# Altium PCB PCB_WSTICKSR.pcbdoc
Units mm, origin at the board's own origin, x right, y up, seen from the top; angles counter-clockwise.
Board outline 77.3 x 48.71 mm, 2 copper layers (Top Layer, Bottom Layer); 59 components, 34 nets, 182 pads, 73 vias.
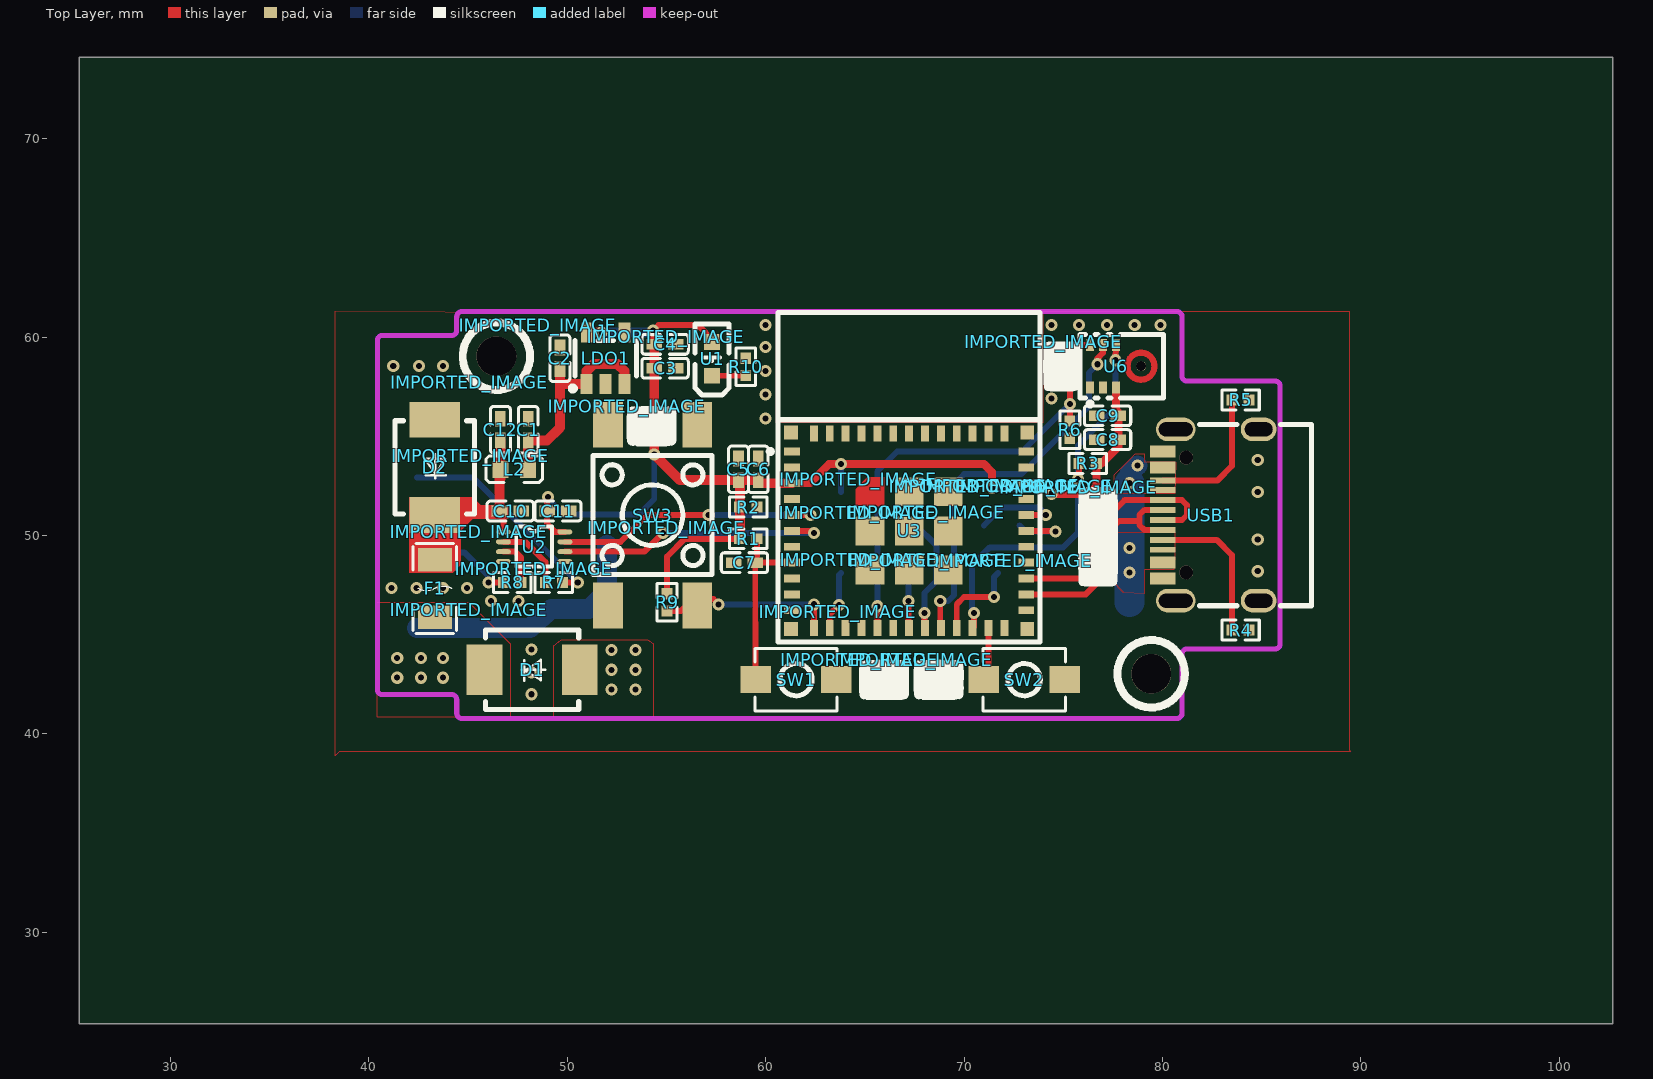
[diagram p0: Top Layer view]
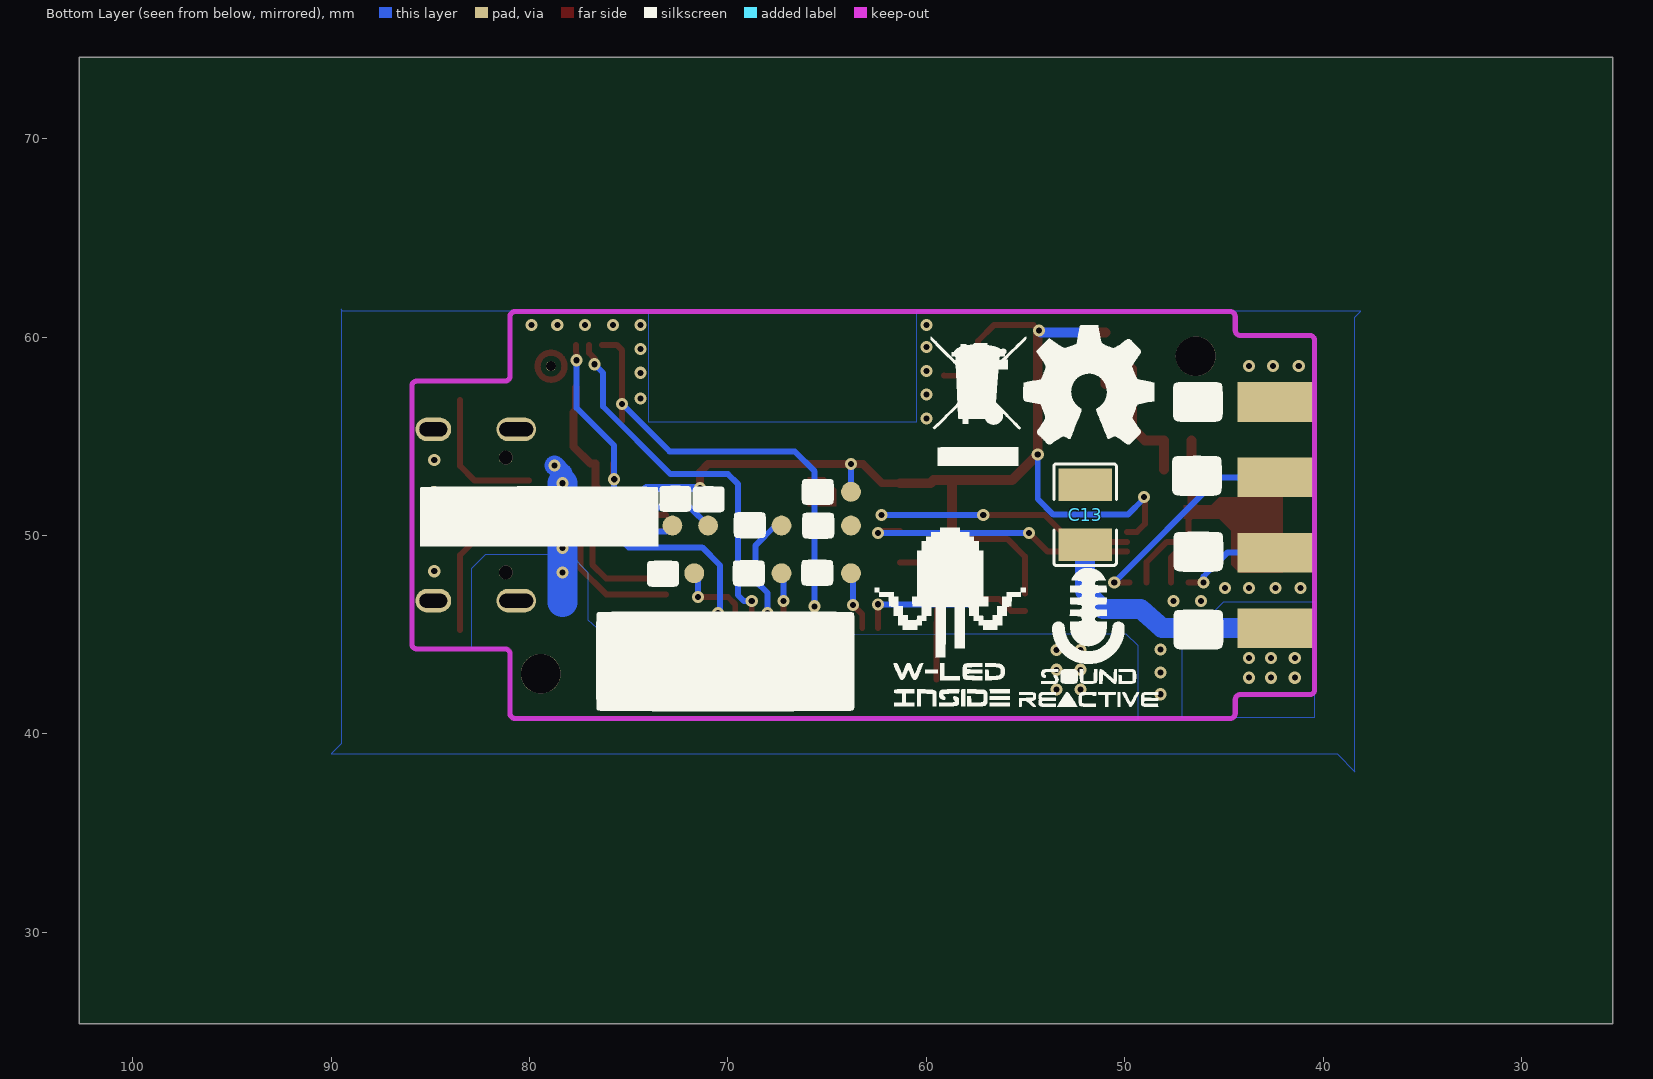
[diagram p1: Bottom Layer view, seen from below]

## Layer stack, top to bottom
Top Layer: signal copper (thickness not stored)
Dielectric: dielectric 0.32, FR-4, Dk 4.8
Bottom Layer: signal copper (thickness not stored)

## Board outline
102.7,25.4 25.4,25.4 25.4,74.11 102.7,74.11

## Components (designator, comment, footprint, x,y, rotation, side; value= is the part's Value field where it differs from the comment)
C1 "100nF" C0402 48.032,55.332 r270 top
C2 "10uF" C0402 49.632,58.932 r270 top
C3 "10uF" C0402 54.932,58.432 r180 top
C4 "100nF" C0402 54.932,59.632 r180 top
C5 "100nF" C0402 58.632,53.332 r270 top
C6 "10uF" C0402 59.632,53.332 r270 top
C7 "1uF" C0402 58.932,48.632 r180 top
C8 "220pF" C0402 77.232,54.832 r180 top
C9 "100nF" C0402 77.232,56.032 r180 top
C10 "100nF" C0402 47.132,51.232 r180 top
C11 "100nF" C0402 49.532,51.232 r180 top
C12 "100nF" C0402 46.632,55.332 r270 top
C13 "100uF" C1210 52,51.05 r90 bottom
D1 "SS34" SMB_L4.6-W3.6-LS5.3-R-RD 48.232,43.232 r0 top
D2 "SS34" SMB_L4.6-W3.6-LS5.3-R-RD 43.332,53.432 r90 top
F1 "1206L050/15YR" F1206 43.332,47.332 r90 top
IMPORTED_IMAGE "IMPORTED_IMAGE" IMPORTED_IMAGE 48.321,48.327 r0 top
IMPORTED_IMAGE "IMPORTED_IMAGE" IMPORTED_IMAGE 63.629,46.154 r0 top
IMPORTED_IMAGE "IMPORTED_IMAGE" IMPORTED_IMAGE 73.517,52.47 r0 top
IMPORTED_IMAGE "IMPORTED_IMAGE" IMPORTED_IMAGE 64.676,52.845 r0 top
IMPORTED_IMAGE "IMPORTED_IMAGE" IMPORTED_IMAGE 64.651,51.145 r0 top
IMPORTED_IMAGE "IMPORTED_IMAGE" IMPORTED_IMAGE 72.476,48.72 r0 top
IMPORTED_IMAGE "IMPORTED_IMAGE" IMPORTED_IMAGE 68.151,48.745 r0 top
IMPORTED_IMAGE "IMPORTED_IMAGE" IMPORTED_IMAGE 64.701,48.77 r0 top
IMPORTED_IMAGE "IMPORTED_IMAGE" IMPORTED_IMAGE 68.101,51.17 r0 top
IMPORTED_IMAGE "IMPORTED_IMAGE" IMPORTED_IMAGE 70.176,52.47 r0 top
IMPORTED_IMAGE "IMPORTED_IMAGE" IMPORTED_IMAGE 71.851,52.495 r0 top
IMPORTED_IMAGE "IMPORTED_IMAGE" IMPORTED_IMAGE 45.045,46.257 r0 top
IMPORTED_IMAGE "IMPORTED_IMAGE" IMPORTED_IMAGE 45.07,57.732 r0 top
IMPORTED_IMAGE "IMPORTED_IMAGE" IMPORTED_IMAGE 45.045,50.182 r0 top
IMPORTED_IMAGE "IMPORTED_IMAGE" IMPORTED_IMAGE 45.12,54.007 r0 top
IMPORTED_IMAGE "IMPORTED_IMAGE" IMPORTED_IMAGE 48.509,60.59 r0 top
IMPORTED_IMAGE "IMPORTED_IMAGE" IMPORTED_IMAGE 54.976,60.009 r0 top
IMPORTED_IMAGE "IMPORTED_IMAGE" IMPORTED_IMAGE 55,50.4 r0 top
IMPORTED_IMAGE "IMPORTED_IMAGE" IMPORTED_IMAGE 64.725,43.729 r0 top
IMPORTED_IMAGE "IMPORTED_IMAGE" IMPORTED_IMAGE 67.475,43.729 r0 top
IMPORTED_IMAGE "IMPORTED_IMAGE" IMPORTED_IMAGE 53.006,56.507 r0 top
IMPORTED_IMAGE "IMPORTED_IMAGE" IMPORTED_IMAGE 74.001,59.772 r0 top
IMPORTED_IMAGE "IMPORTED_IMAGE" IMPORTED_IMAGE 75.755,52.43 r0 top
L2 "120Ω" L0603 47.332,53.332 r0 top
LDO1 "ME6211C33M5G-N" SOT-23-5_L3.0-W1.7-P0.95-LS2.8-BR 51.932,58.932 r270 top
R1 "10kΩ" R0402 59.132,49.832 r0 top
R2 "10kΩ" R0402 59.132,51.432 r180 top
R3 "10kΩ" R0402 76.232,53.632 r0 top
R4 "5.1kΩ" R0402 83.932,45.232 r0 top
R5 "5.1kΩ" R0402 83.932,56.832 r0 top
R6 "100K" R0402 75.332,55.332 r90 top
R7 "470Ω" R0402 49.332,47.632 r180 top
R8 "470Ω" R0402 47.232,47.632 r0 top
R9 "10kΩ" R0402 55.032,46.632 r270 top
R10 "1.5kΩ" R0402 59,58.5 r90 top
SW1 "TS-1088-AR02016" SW-SMD_L4.0-W2.9-LS5.0 61.532,42.732 r180 top
SW2 "TS-1088-AR02016" SW-SMD_L4.0-W2.9-LS5.0 73.032,42.732 r180 top
SW3 "KH-6X6X9H-STM" SW-SMD_4P-L6.0-W6.0-P4.50-LS9.0-2 54.3,51.025 r270 top
U1 "GHC-YR1S2/3T" LED0603-R-RD_GREEN 57.3,58.9 r90 top
U2 "SN74LVC2T45DCUR" VSSOP-8_L2.4-W2.1-P0.50-LS3.2-BR 48.332,49.432 r180 top
U3 "ESP32-C3-MINI-1-N4" WIFIM-SMD_ESP32-C3-MINI-1 67.232,50.232 r0 top
U6 "ICS-43432" SENSOR-SMD_ICS-43432 77.632,58.532 r0 top
USB1 "KH-TYPE-C-16P" USB-C-SMD_KH-TYPE-C-16P 82.432,51.032 r90 top

## Footprints (in the part's own frame and the unit in brackets; to place one, negate y for a bottom-side part, rotate by r counter-clockwise, add the part's x,y. Pads: shape width x height; smd on the part's side, far side on the other; paste and mask are expansions set on the pad)
C0402 [mm]
  rect 0.79x0.54 smd: 1(-0.545,0) 2(0.545,0)
  silkscreen extent -1.17,-0.5 1.17,0.5
C1210 [mm]
  rect 1.635x2.7 smd: 1(1.517,0) 2(-1.517,0)
  silkscreen extent -2.56,-1.58 2.56,1.58
F1206 [mm]
  rect 1.19x1.728 smd: 1(-1.445,0) 2(1.445,0)
  silkscreen extent -2.27,-1.09 2.27,1.09
IMPORTED_IMAGE [mm]
L0603 [mm]
  rect 0.8x0.864 smd: 1(-0.7,0) 2(0.7,0)
  silkscreen extent -1.42,-0.65 1.41,0.67
LED0603-R-RD_GREEN [mm]
  rect 0.8x0.8 smd: 1(0.851,0) 2(-0.851,0)
  silkscreen extent -1.82,-0.86 1.77,0.86
R0402 [mm]
  rect 0.566x0.54 smd: 1(-0.433,0) 2(0.433,0)
  silkscreen extent -0.94,-0.5 0.94,0.5
SENSOR-SMD_ICS-43432 [mm]
  rect 0.4x0.6 smd: 1(-1.28,-1.075) 2(-0.63,-1.075) 3(0.02,-1.075) 5(0.02,1.075) 6(-0.63,1.075) 7(-1.28,1.075)
  round 0 smd: 4(1.28,0.68)
  round 0.5 hole 0.5 unplated: ""(1.295,0)
  Top Layer region: 234 vertices and 0 holes, not listed, extent 0.455,-0.825 2.105,0.825
  silkscreen extent -1.78,-2 2.42,1.6
SMB_L4.6-W3.6-LS5.3-R-RD [mm]
  rect 1.8x2.54 smd: 1(2.4,0) 2(-2.4,0)
  silkscreen extent -2.35,-2 2.35,2
SOT-23-5_L3.0-W1.7-P0.95-LS2.8-BR [mm]
  rect 1x0.6 smd: 1(1.3,-0.95) 2(1.3,0) 3(1.3,0.95) 4(-1.3,0.95) 5(-1.3,-0.95)
  silkscreen extent -0.9,-1.78 1.65,1.55
SW-SMD_4P-L6.0-W6.0-P4.50-LS9.0-2 [mm]
  rect 2.3x1.5 smd: 1(-4.55,2.25) 2(4.55,2.25) 3(-4.55,-2.25) 4(4.55,-2.25)
  silkscreen extent -3,-3 3,3
SW-SMD_L4.0-W2.9-LS5.0 [mm]
  rect 1.53x1.36 smd: 1(-2.035,0) 2(2.035,0)
  silkscreen extent -2.08,-1.58 2.08,1.58
USB-C-SMD_KH-TYPE-C-16P [mm]
  oval 1.2x2 hole 0.7 slot 1.7 at 90 deg: 1(-4.32,1.765) 2(4.32,1.765)
  oval 1.2x1.8 hole 0.7 slot 1.4 at 90 deg: 3(-4.32,-2.415) 4(4.32,-2.415)
  rect 0.3x1.3 smd: A1(-3.35,2.415) A4(-2.55,2.415) A5(-1.25,2.415) A6(-0.25,2.415) A7(0.25,2.415) A8(1.25,2.415) A9(2.55,2.415) A12(3.35,2.415) B1(3.05,2.415) B4(2.25,2.415) B5(1.75,2.415) B6(0.75,2.415) B7(-0.75,2.415) B8(-1.75,2.415) B9(-2.25,2.415) B12(-3.05,2.415)
  round 0.7 hole 0.7 unplated: ""(-2.89,1.235) ""(2.89,1.235)
  silkscreen extent -4.57,-5.08 4.57,0.57
VSSOP-8_L2.4-W2.1-P0.50-LS3.2-BR [mm]
  oval 0.75x0.25 smd: 1(1.55,-0.75) 2(1.55,-0.25) 3(1.55,0.25) 4(1.55,0.75) 5(-1.55,0.75) 6(-1.55,0.25) 7(-1.55,-0.25) 8(-1.55,-0.75)
  silkscreen extent -0.9,-1.02 0.9,1
WIFIM-SMD_ESP32-C3-MINI-1 [mm]
  rect 0.8x0.4 smd: 1(-5.9,4) 2(-5.9,3.2) 3(-5.9,2.4) 4(-5.9,1.6) 5(-5.9,0.8) 6(-5.9,0) 7(-5.9,-0.8) 8(-5.9,-1.6) 9(-5.9,-2.4) 10(-5.9,-3.2) 11(-5.9,-4) 25(5.9,-4) 26(5.9,-3.2) 27(5.9,-2.4) 28(5.9,-1.6) 29(5.9,-0.8) 30(5.9,0) 31(5.9,0.8) 32(5.9,1.6) 33(5.9,2.4) 34(5.9,3.2) 35(5.9,4)
  rect 0.4x0.8 smd: 12(-4.8,-4.9) 13(-4,-4.9) 14(-3.2,-4.9) 15(-2.4,-4.9) 16(-1.6,-4.9) 17(-0.8,-4.9) 18(0,-4.9) 19(0.8,-4.9) 20(1.6,-4.9) 21(2.4,-4.9) 22(3.2,-4.9) 23(4,-4.9) 24(4.8,-4.9) 36(4.8,4.9) 37(4,4.9) 38(3.2,4.9) 39(2.4,4.9) 40(1.6,4.9) 41(0.8,4.9) 42(0,4.9) 43(-0.8,4.9) 44(-1.6,4.9) 45(-2.4,4.9) 46(-3.2,4.9) 47(-4,4.9) 48(-4.8,4.9)
  rect 1.45x1.45 smd: 49(-1.975,-1.975) 49(-1.975,0) 49(0,-1.975) 49(0,0) 49(0,1.975) 49(1.975,-1.975) 49(1.975,0) 49(1.975,1.975)
  round 0 smd: 49(-1.975,1.975)
  rect 0.7x0.7 smd: 50(5.95,4.95) 51(5.95,-4.95) 52(-5.95,-4.95) 53(-5.95,4.95)
  Top Layer region: -2.7,2.1 -2.1,2.7 -1.25,2.7 -1.25,1.25 -2.7,1.25
  silkscreen extent -7.1,-5.6 6.6,11

## Free pads (board coordinates)
  rect 3.8x2 smd far side: 1(42.432,45.332) 1(42.432,49.132) 1(42.432,52.932) 1(42.432,56.732)
  round 1 smd far side: 1(63.8,48.1) 1(63.8,50.5) 1(63.8,52.2) 1(67.3,48.1) 1(67.3,50.5) 1(71,50.5) 1(71.7,48.1) 1(72.8,50.5)
  round 2 hole 2 unplated: ""(46.432,59.032) ""(79.432,43.032)

## Via types
v1: diameter 0.61, hole 0.305, Top Layer to Bottom Layer, tented both sides, 57 vias
v2: diameter 0.61, hole 0.31, Top Layer to Bottom Layer, tented both sides, 16 vias

## Nets (pads, with @x,y where several pads share a name; then routed paths per layer and width w, separated by ;. In a path a pad name is that pad's centre, name@x,y a point inside that pad or via, vN(x,y) a via of type N, cw(c..) or ccw(c..) an arc to the next point about the centre after c; other vN are vias at no path point)
3V3: C3.2 C4.2 C5.2 C6.2 C8.1 C9.1 C11.2 LDO1.5 pad.1@63.8,52.2 R1.1 R2.2 R3.2 R9.1 U1.1 U2.8 U3.3 U6.3 | length 64.5
  Top Layer w0.3: v1(49.032,51.932) 48.987,51.887 C11.2 48.987,50.577 49.382,50.182 U2.8 ; v1(54.332,60.332) 54.6,60.6 56.6,60.6 57.4,59.8 U1.1@57.4,59.751 ; R9.1 55.032,48.932 55.932,49.832 R1.1
  Top Layer w0.4: U3.3 62.232,52.632 63.2,53.6 v1(63.8,53.6) 71,53.6 71.4,53.2 v2(71.4,52.4) ; v2(74.4,52.1) 76.3,52.1 76.665,52.465 R3.2 76.932,53.632 77.777,54.477 C8.1 C9.1 77.777,56.207 77.652,56.332 U6.3
  Top Layer w0.5: LDO1.5 v1(51.732,60.232) ; v1(54.332,60.332) 54.387,60.277 C4.2 C3.2 v1(54.387,54.077) 55.677,52.787 C6.2 59.787,52.632 U3.3 ; C5.2 58.699,52.72 R2.2 R1.1
  Bottom Layer w0.3: v1(49.032,51.932) 49.033,51.867 49.85,51.049 53.6,51.049 54.387,51.836 v1(54.387,54.077) ; pad.1@63.8,52.2 v1(63.8,53.6)
  Bottom Layer w0.4: v2(71.4,52.4) 74.1,52.4 v2(74.4,52.1)
  Bottom Layer w0.5: v1(51.732,60.232) 54.232,60.232 v1(54.332,60.332)
BTN: R9.2 SW3.2 U3.12 | length 9
  Top Layer w0.3: R9.2 55.732,46.199 56.333,46.8 56.5,46.8 57.364,46.8 v1(57.632,46.532) ; U3.12 v2(62.432,46.532)
  Bottom Layer w0.3: v1(57.632,46.532) v2(62.432,46.532)
CC1: R4.1 USB1.A5 | length 7.6
  Top Layer w0.3: USB1.A5 82.732,49.782 83.499,49.015 R4.1
CC2: R5.1 USB1.B5 | length 7.1
  Top Layer w0.3: USB1.B5 82.782,52.782 83.499,53.499 R5.1
CN1_2: pad.1@42.432,52.932 R7.1 | length 11.1
  Top Layer w0.3: R7.1 v1(50.532,47.632)
  Bottom Layer w0.3: pad.1@42.432,52.932 45.232,52.932 v1(50.532,47.632)
CN1_3: pad.1@42.432,49.132 R8.1 | length 5.2
  Top Layer w0.3: v1(46.032,47.632) R8.1
  Bottom Layer w0.3: pad.1@42.432,49.132 44.832,49.132 46.032,47.932 v1(46.032,47.632)
D1: U2.7 U3.5 | length 13.9
  Top Layer w0.3: U2.7 52.682,49.682 54.032,51.032 v2(57.132,51.032) ; U3.5 v2(62.256,51.032)
  Bottom Layer w0.3: v2(57.132,51.032) v2(62.256,51.032)
D2: U2.6 U3.6 | length 14.1
  Top Layer w0.3: U2.6 53.882,49.182 v2(54.832,50.132) ; U3.6 62.332,50.232 v2(62.432,50.132)
  Bottom Layer w0.3: v2@54.832,50.132 v2(62.432,50.132)
D+: U3.27 USB1.A6 USB1.B6 | length 12.8
  Top Layer w0.3: U3.27@73.132,47.831 76.132,47.831 76.833,48.532 76.833,50.533 78.083,51.783 USB1.B6 80.983,51.783 81.232,51.531 81.232,51.031 80.983,50.782 USB1.A6
D-: U3.26 USB1.A7 USB1.B7 | length 11.5
  Top Layer w0.3: U3.26 76.132,47.033 77.432,48.331 77.432,50.333 77.831,50.731 78.832,50.731 ; USB1.B7 79.082,50.282 78.832,50.532 78.832,51.032 79.082,51.282 USB1.A7
EXT: C13.2 D1.2 F1.1 pad.1@42.432,45.332 | length 12.6
  Bottom Layer w1: pad.1@42.431,45.331 48.118,45.331 49.2,46.3 51.1,46.3 52,47.2 C13.2
  other v1: 41.432,42.832 42.632,42.832 43.732,42.832 41.432,43.832 42.632,43.832 43.732,43.832
GND: C1.1 C2.1 C3.1 C4.1 C5.1 C6.1 C7.2 C8.2 C9.2 C10.1 C11.1 C12.1 C13.1 D2.1 LDO1.2 pad.1@42.432,56.732 pad.1@63.8,50.5 R4.2 R5.2 R6.1 R10.2 SW1.1 SW2.1 SW3.3 U2.4 U2.5 U3.1 U3.2 U3.11 U3.14 U3.36 U3.37 U3.38 U3.39 U3.40 U3.41 U3.42 U3.43 U3.44 U3.45 U3.46 U3.47 U3.48 U3.49 U3.50 U3.51 U3.52 U3.53 U6.1 U6.2 U6.4 USB1.1 USB1.2 USB1.3 USB1.4 USB1.A1 USB1.A12 USB1.B1 USB1.B12
  other v1: 48.2,42 48.2,43.1 48.2,44.25 46.15,46.7 47.55,46.7 41.15,47.35 42.4,47.35 43.75,47.35 44.95,47.35 84.8,48.2 84.8,49.8 84.8,52.2 84.8,53.8 60,55.9 74.4,56.9 60,57.1 74.4,58.2 60,58.3 41.232,58.532 42.532,58.532 43.732,58.532 74.4,59.4 60,59.5 60,60.6 74.4,60.6 75.8,60.6 77.2,60.6 78.6,60.6 79.9,60.6
IO1: pad.1@63.8,48.1 U3.13 | length 3
  Top Layer w0.3: U3.13@63.231,45.331 63.231,46.032 v2(63.701,46.5)
  Bottom Layer w0.3: v2(63.701,46.5) 63.701,48.001 pad.1@63.8,48.1
IO2: R2.1
IO4: pad.1@67.3,48.1 U3.18 | length 2.8
  Top Layer w0.3: v2(67.2,46.7) 67.2,45.364 U3.18
  Bottom Layer w0.3: v2(67.2,46.7) 67.2,48 pad.1@67.3,48.1
IO5: pad.1@67.3,50.5 U3.19 | length 6.1
  Top Layer w0.3: v2(68,46.1) 68,45.364 U3.19
  Bottom Layer w0.3: pad.1@67.3,50.5 67.6,50.5 68.601,49.499 68.601,47.701 67.999,47.099 v2@67.999,46.101
IO7: pad.1@71.7,48.1 U3.21 | length 4.5
  Top Layer w0.3: U3.21 69.632,46.532 70,46.9 v2(71.5,46.9)
  Bottom Layer w0.3: v2(71.5,46.9) 71.5,47.9 pad.1@71.7,48.1
IO9: SW2.2 U3.23 | length 2.6
  Top Layer w0.3: SW2.2 71.232,43.432 71.232,44.032 U3.23
L1: R7.2 U2.2 | length 3.6
  Top Layer w0.3: U2.2 47.882,49.682 48.899,48.665 R7.2
L2: R8.2 U2.3 | length 2.3
  Top Layer w0.3: U2.3 47.382,49.182 47.665,48.899 R8.2
LDO1_1: C1.2 C2.2 L2.2 LDO1.1 LDO1.3 | length 11.2
  Top Layer w0.5: C1.2 48.987,54.788 49.632,55.433 C2.2 ; L2.2 C1.2 ; 49.632,57.524 49.74,57.632 LDO1.1 ; LDO1.1 50.982,58.282 51.332,58.632 52.532,58.632 52.882,58.282 LDO1.3
RXD: pad.1@72.8,50.5 U3.30 | length 3.4
  Top Layer w0.3: U3.30 74.568,50.232 v2(74.6,50.2)
  Bottom Layer w0.3: pad.1@72.8,50.5 73.1,50.2 v2(74.6,50.2)
S$5783: 
S$5790: 
SCK: U3.20 U6.6 | length 19.6
  Top Layer w0.3: v1(68.8,46.7) 68.8,45.364 U3.20 ; v2(76.732,58.632) 76.732,58.932 77.002,59.202 U6.6
  Bottom Layer w0.3: v1(68.8,46.7) 69.2,46.7 69.5,47 69.5,52.6 70,53.101 72.901,53.101 76.299,56.5 76.299,58.199 v2(76.732,58.632)
SD: R6.2 U3.16 U6.7 | length 23.7
  Top Layer w0.3: U3.16 v1(65.632,46.432) ; R6.2 v1(75.332,56.629) 75.332,59.332 75.607,59.607 U6.7
  Bottom Layer w0.3: v1(65.632,46.432) 65.632,53.232 66.632,54.232 72.936,54.232 v1(75.332,56.629)
SW1_2: C7.1 R1.2 SW1.2 U3.8 | length 9
  Top Layer w0.3: C7.1@59.477,48.633 SW1.2 ; R1.2 59.565,48.932 59.477,48.844 59.477,48.632 U3.8
SW3_1: SW3.1
SW3_4: SW3.4
TXD: pad.1@71,50.5 U3.31 | length 4.7
  Top Layer w0.3: U3.31 v2(74.116,51.032)
  Bottom Layer w0.3: pad.1@71,50.5 71.9,51.4 73.8,51.4 74.116,51.084 v2(74.116,51.032)
U1_2: R10.1 U1.2 | length 1.7
  Top Layer w0.3: U1.2@57.399,58.049 R10.1@59.101,58.067
VBUS: D1.1 USB1.A4 USB1.A9 USB1.B4 USB1.B9 | length 7.1
  Bottom Layer w1: v1(78.332,52.632) 78.332,53.132 v1(78.732,53.532)
  Bottom Layer w1.5: 78.332,46.632 v1(78.332,48.136) v1(78.332,49.369) v1(78.332,52.632)
  other v1: 52.232,42.232 53.432,42.232 52.232,43.232 53.432,43.232 52.232,44.232 53.432,44.232
VIN: C10.2 C12.2 D2.2 F1.2 L2.1 U2.1 | length 4.7
  Top Layer w0.3: C10.2 46.587,51.027 46.782,50.832 U2.1
  Top Layer w0.5: C10.2 46.587,52.832 46.632,52.877 L2.1 C12.2
WS: R3.1 U3.22 U6.5 | length 20.3
  Top Layer w0.3: U3.22 70.5,45.4 v1(70.5,46.1) ; v2(75.732,52.832) 75.799,52.899 R3.1 ; v2(77.632,58.832) U6.5@77.651,59.606
  Bottom Layer w0.3: v1(70.5,46.1) 70.399,46.2 70.399,48.499 71.301,49.4 74.999,49.4 75.733,50.132 v2(75.732,52.832) 75.732,54.532 77.632,56.432 v2(77.632,58.832)
pads on no net: LDO1.4 U3.4 U3.7 U3.9 U3.10 U3.15 U3.17 U3.24 U3.25 U3.28 U3.29 U3.32 U3.33 U3.34 U3.35 U6. USB1. USB1.A8 USB1.B8

## Polygon pours and split planes (outlines as drawn)
EXT on Bottom Layer (solid): 40.432,46.632 45.032,46.632 47.132,44.532 47.132,40.832 40.432,40.832
VBUS on Bottom Layer (solid): 49.332,40.832 49.332,44.432 49.932,45.032 59.432,45.032 76.132,44.932 77.032,45.732 77.032,48.132 77.932,49.032 82.232,49.032 82.932,48.332 82.932,44.332 81.232,44.332 80.932,44.032 80.932,40.932 80.732,40.732 49.332,40.732
GND on Bottom Layer (solid): 60.5,61.3 60.5,55.7 74,55.7 74,61.3 89.4,61.3 89.5,61.4 89.5,39.5 90,39 39.3,39 38.4,38.1 38.4,61 38.1,61.3
EXT on Top Layer (solid): 40.432,46.632 45.032,46.632 47.132,44.532 47.132,40.832 40.432,40.832
VBUS on Top Layer (solid): 54.05,44.75 54.332,44.532 54.332,40.832 49.332,40.832 49.332,44.432 49.7,44.75
VBUS on Top Layer (solid): 80.632,48.932 80.632,50.132 77.432,50.132 77.432,47.732 78.032,47.132 79.1,47.1 79.1,48.3 80.6,48.3
VBUS on Top Layer (solid): 80.632,52.132 80.7,53.7 79.1,53.7 79.1,54.1 78.6,54.1 77.532,53.032 77.532,52.132
GND on Top Layer (solid): 60.5,61.2 60.5,55.7 74,55.7 74,61.3 89.4,61.3 89.4,39.2 89.5,39.1 38.5,39.1 38.3,38.9 38.3,61.3

## Keep-outs
Keep-Out Layer:
  lines w0.254: 40.432,42.232 ccw(c40.682,42.232) 40.682,41.982 ; 40.432,59.832 cw(c40.682,59.832) 40.682,60.082 ; 44.182,41.982 cw(c44.182,41.732) 44.432,41.732 ; 44.182,60.082 ccw(c44.182,60.332) 44.432,60.332 ; 44.432,41.032 ccw(c44.682,41.032) 44.682,40.782 ; 44.432,61.032 cw(c44.682,61.032) 44.682,61.282 ; 80.732,40.782 ccw(c80.732,41.032) 80.982,41.032 ; 80.732,61.282 cw(c80.732,61.032) 80.982,61.032 ; 80.982,44.032 cw(c81.232,44.032) 81.232,44.282 ; 80.982,58.032 ccw(c81.232,58.032) 81.232,57.782 ; 85.682,44.282 ccw(c85.682,44.532) 85.932,44.532 ; 85.682,57.782 cw(c85.682,57.532) 85.932,57.532

## Other copper
Top Layer:
  region net VIN: 47.032,50.832 45.232,50.832 44.632,50.232 43.832,51.032 43.332,51.032 42.532,50.232 42.032,50.232 42.032,51.932 45.232,51.932 45.632,51.532 47.032,51.532
  region net VIN: 44.232,48.132 44.632,48.532 44.632,50.032 44.632,51.932 42.032,51.932 42.032,48.132

## Silkscreen, mask and mechanical layers (free items; w line width, h text height)
Top Overlay:
  circle w0.4: c79.432,43.032 r1.7
  circle w0.4: c46.432,59.032 r1.7
Document:
  lines w0.254 net S$5783: 40.432,51.032 85.932,51.032
  lines w0.254 net S$5790: 62.731,40.782 62.731,61.283